# EAGLE board Leiterplatte_Led_ring (EAGLE 9.7.0)
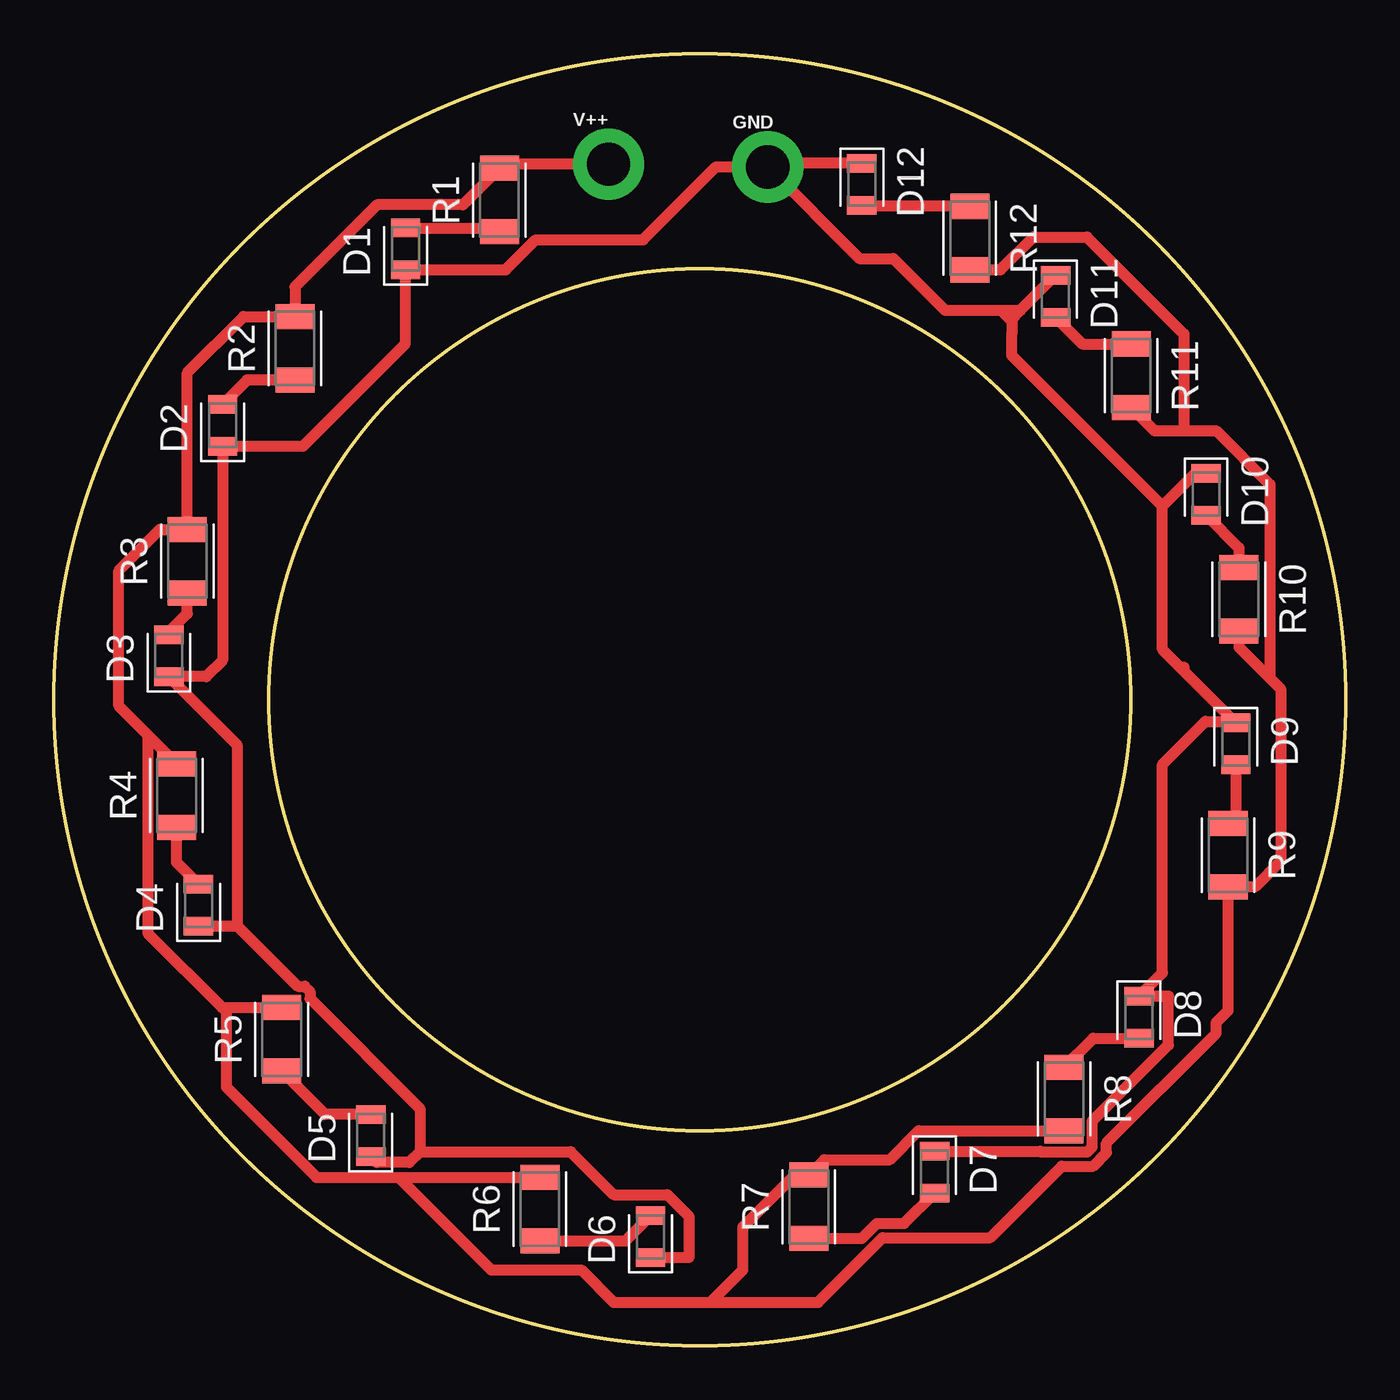
[diagram p0: board, top side]

Size 60.03 x 60.03 mm. Coordinates in mm from the lower left corner, seen from the top.
Outline: circle at 30.02,30.02 radius 20.02
Outline: circle at 30.02,30.02 radius 30.02
Copper layers (1*16): Top 0.035mm / dielectric 1.5mm / Bottom 0.035mm
Design rules "default": minimum track width 6mil, minimum drill 0.35mm, track to track 6mil, track to pad 6mil, pad to pad 6mil, via to via 6mil, smd to smd 6mil, copper to edge 40mil, drill to drill 6mil, minimum pad ring 10mil, minimum via ring 8mil, stop-mask expansion 4mil, vias tented up to drill 0mil, thermal gap 10mil

## Footprints (pad centres in the part's own frame; a part is rotated, then mirrored left to right if it is on the bottom)
LEDC2012X105N_RND-R = smd 0.862 x 1.362: A 0.975,0; C -0.975,0
1X01_2MM = drill 2 pad 3.302: 1 0,0
RESC3216X70 = smd 1.165 x 1.815: 1 -1.475,0; 2 1.475,0

## Placement (x,y rotation side)
D1  LED_GREEN  [LEDC2012X105N_RND-R]  16.35,50.97 90 top
D2  LED_GREEN  [LEDC2012X105N_RND-R]  7.85,42.77 90 top
D3  LED_GREEN  [LEDC2012X105N_RND-R]  5.35,32.07 90 top
D4  LED_GREEN  [LEDC2012X105N_RND-R]  6.73,20.47 90 top
D5  LED_GREEN  [LEDC2012X105N_RND-R]  14.73,9.77 90 top
D6  LED_GREEN  [LEDC2012X105N_RND-R]  27.73,5.07 90 top
D7  LED_GREEN  [LEDC2012X105N_RND-R]  40.93,8.07 270 top
D8  LED_GREEN  [LEDC2012X105N_RND-R]  50.43,15.27 270 top
D9  LED_GREEN  [LEDC2012X105N_RND-R]  54.93,27.97 270 top
D10  LED_GREEN  [LEDC2012X105N_RND-R]  53.55,39.57 270 top
D11  LED_GREEN  [LEDC2012X105N_RND-R]  46.55,48.77 270 top
D12  LED_GREEN  [LEDC2012X105N_RND-R]  37.55,53.97 270 top
GND  [1X01_2MM]  33.18,54.78 0 top
R1  120Ohm  [RESC3216X70]  20.71,53.24 90 top
R2  120Ohm  [RESC3216X70]  11.21,46.35 90 top
R3  120Ohm  [RESC3216X70]  6.21,36.46 90 top
R4  120Ohm  [RESC3216X70]  5.71,25.57 90 top
R5  120Ohm  [RESC3216X70]  10.59,14.24 90 top
R6  120Ohm  [RESC3216X70]  22.59,6.35 90 top
R7  120Ohm  [RESC3216X70]  35.09,6.46 90 top
R8  120Ohm  [RESC3216X70]  46.95,11.47 270 top
R9  120Ohm  [RESC3216X70]  54.57,22.8 270 top
R10  120Ohm  [RESC3216X70]  55.07,34.69 270 top
R11  120Ohm  [RESC3216X70]  50.07,45.08 270 top
R12  120Ohm  [RESC3216X70]  42.57,51.47 270 top
V++  [1X01_2MM]  25.78,54.9 0 top

## Library data of the parts
D1-D12 = LED; CATEGORY: LED; COLOR: RED; DESCRIPTION: CHIP LED ROUND; SUB-CATEGORY: CHIP; TYPE: ROUND_TOP
GND V++ = SparkFun-Connectors
R1-R12 = Resistor; CATEGORY: Resistor; SUB-CATEGORY: Fixed

## Nets
N$1: R1.2 R2.2 R3.2 R4.2 R5.2 R6.2 R7.2 R8.2 R9.2 R10.2 R11.2 R12.2 V++.1
N$2: D1.A R1.1
N$3: D2.A R2.1
N$4: D3.A R3.1
N$5: D4.A R4.1
N$6: D5.A R5.1
N$7: D6.A R6.1
N$8: D7.A R7.1
N$9: D8.A R8.1
N$10: D9.A R9.1
N$11: D10.A R10.1
N$12: D11.A R11.1
N$13: D12.A R12.1
N$14: D1.C D2.C D3.C D4.C D5.C D6.C D7.C D8.C D9.C D10.C D11.C D12.C GND.1

## Tracks (layer width: path | path; a pad name or v marks a point on that pad's centre or on a via)
N$1
  Top 0.508: V++.1 20.89,54.9 R1.2 19.01,53.02 15.02,53.02 11.21,49.21 R2.2 8.82,47.82 6.21,45.21 R3.2 4.93,37.93 3.02,36.02 3.02,29.73 4.37,28.37 | R4.2 4.37,28.37 | 4.37,28.37 4.37,19.16 7.82,15.71 | 7.82,15.71 R5.2 | 7.82,15.71 8.02,15.52 8.02,12.02 12.21,7.82 16.02,7.82 | 16.02,7.82 R6.2 | 16.02,7.82 20.32,3.52 24.52,3.52 26.02,2.02 30.52,2.02 | 30.52,2.02 32.02,3.52 32.02,5.52 34.43,7.93 R7.2 35.8,8.65 38.84,8.65 40.19,9.99 R8.2 | 30.52,2.02 35.52,2.02 38.52,5.02 43.52,5.02 46.84,8.34 48.3,8.34 48.92,8.97 48.92,9.42 54.02,14.52 54.02,15.02 54.57,15.57 R9.2 55.82,21.32 57.02,22.52 57.02,30.52 56.52,31.02 | R10.2 55.07,32.47 56.52,31.02 | R11.2 51.15,42.52 52.52,42.52 | 52.52,42.52 54.02,42.52 56.52,40.02 56.52,31.02 | R12.2 43.99,49.99 45.52,51.52 48.02,51.52 52.52,47.02 52.52,42.52
N$2
  Top 0.508: D1.A 20.53,51.94 R1.1
N$3
  Top 0.508: D2.A 8.98,44.87 R2.1
N$4
  Top 0.508: R3.1 6.21,34.02 5.35,33.16 D3.A
N$5
  Top 0.508: D4.A 5.71,22.46 R4.1
N$6
  Top 0.508: D5.A 12.61,10.74 R5.1
N$7
  Top 0.508: R6.1 26.56,4.87 D6.A
N$8
  Top 0.508: R7.1 37.55,4.98 38.24,5.68 39.51,5.68 D7.A
N$9
  Top 0.508: R8.1 48.3,14.29 D8.A
N$10
  Top 0.508: D9.A 54.93,24.63 R9.1
N$11
  Top 0.508: D10.A 55.07,37.07 R10.1
N$12
  Top 0.508: D11.A 47.79,46.55 R11.1
N$13
  Top 0.508: R12.1 37.6,52.94 D12.A
N$14
  Top 0.508: 33.02,54.78 30.78,54.78 27.39,51.39 22.4,51.39 21,49.99 D1.C 16.35,46.57 11.57,41.79 D2.C 7.85,31.85 7.09,31.09 D3.C 8.52,27.92 8.52,19.52 | 33.02,54.78 GND.1 37.44,50.52 39.02,50.52 41.42,48.11 44.02,48.11 | 8.52,19.52 8.49,19.49 D4.C | 8.52,19.52 11.33,16.7 11.66,16.7 11.9,16.46 11.9,16.13 17.02,11.02 17.02,9.02 | 17.02,9.02 16.52,8.52 15,8.52 D5.C | D6.C 29.52,4.09 29.52,6.02 28.52,7.02 26.02,7.02 24.02,9.02 17.02,9.02 | D7.C 45.83,9.04 45.87,9 48.02,9 48.26,9.24 48.26,10.44 51.79,13.97 51.79,16.24 D8.C 51.52,17.33 51.52,27.02 53.52,29.02 54.85,29.02 D9.C 52.52,31.35 | 52.52,31.35 52.52,31.52 | 52.52,31.35 51.52,32.35 51.52,39.02 | 51.52,39.02 53.04,40.54 D10.C | 51.52,39.02 44.52,46.02 44.52,47.02 44.52,47.61 | 44.52,47.61 44.52,47.71 44.92,48.11 | 44.92,48.11 D11.C | D12.C 33.18,54.94 33.02,54.78 | 44.02,48.11 44.92,48.11 | 44.02,48.11 44.52,47.61